# Altium PCB Smart_Umbrella.PcbDoc
Units mil, origin at the board's own origin, x right, y up, seen from the top; angles counter-clockwise.
Board outline 6000 x 4000 mil, 2 copper layers (Top Layer, Bottom Layer); 50 components, 39 nets, 166 pads, 0 vias.
Unrouted connection lines stored in the file: 103.
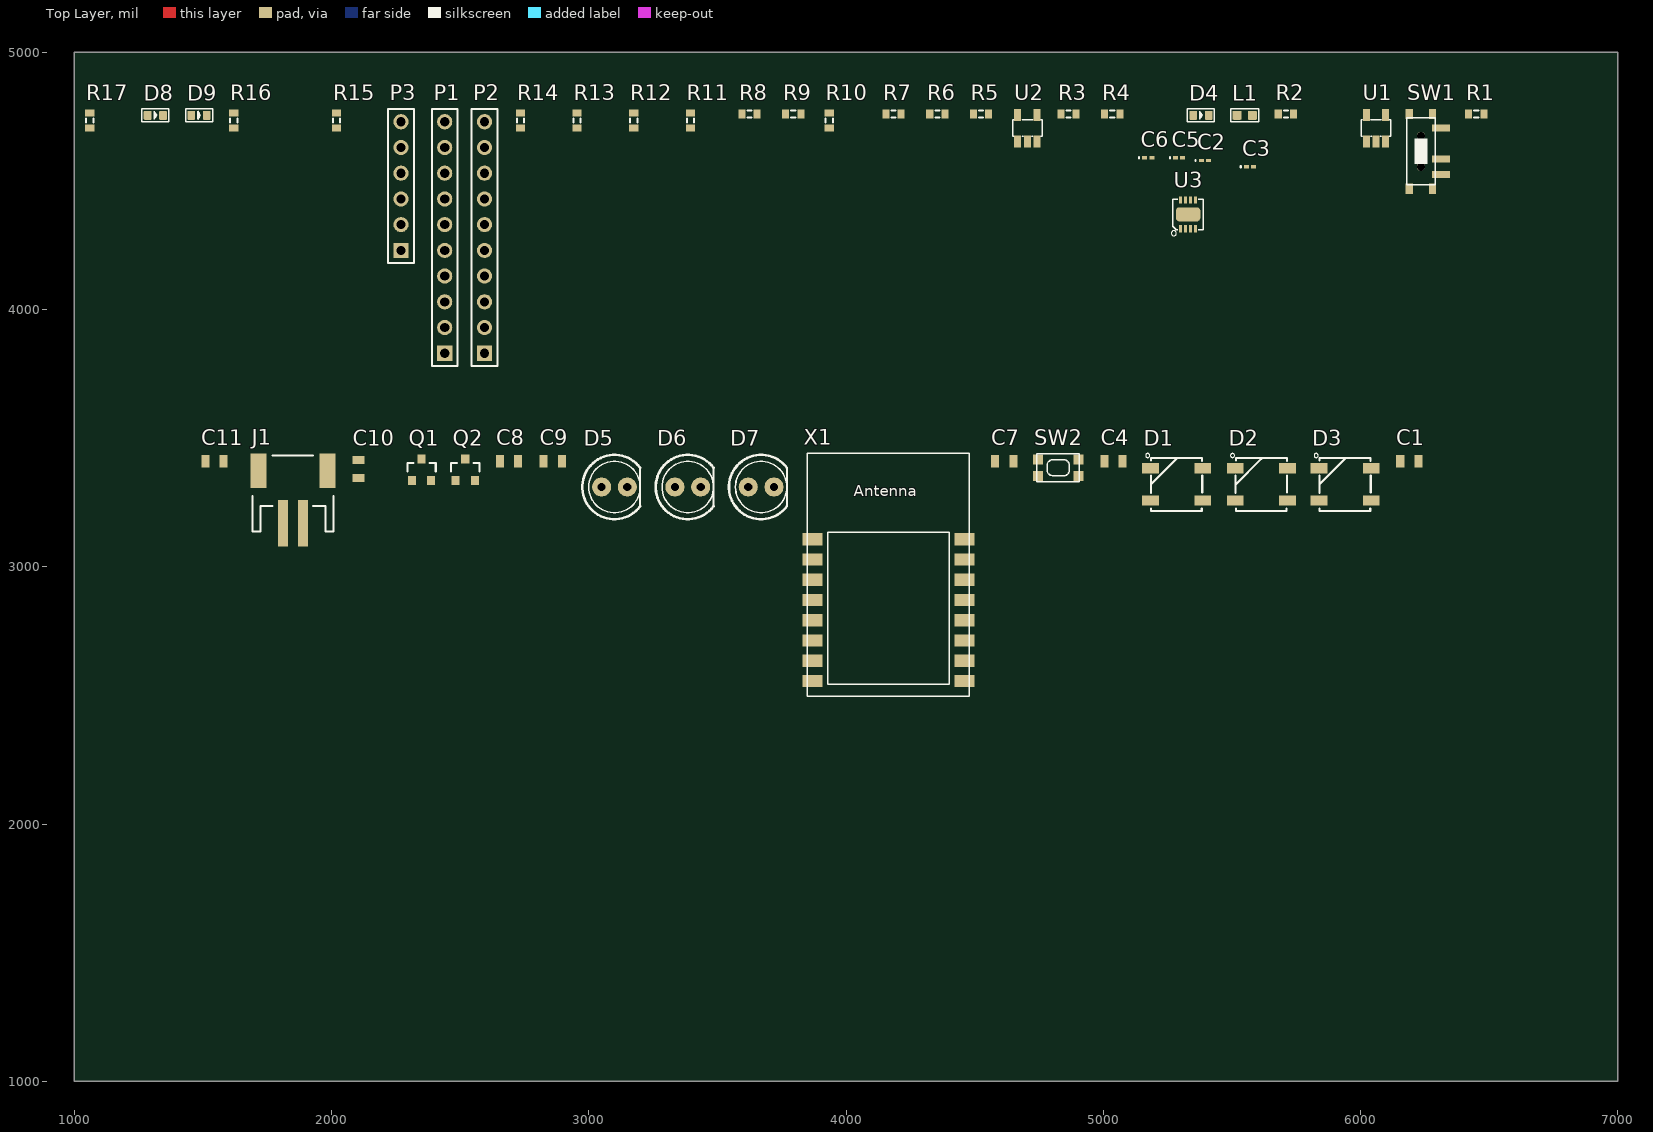
[diagram p0: Top Layer view]
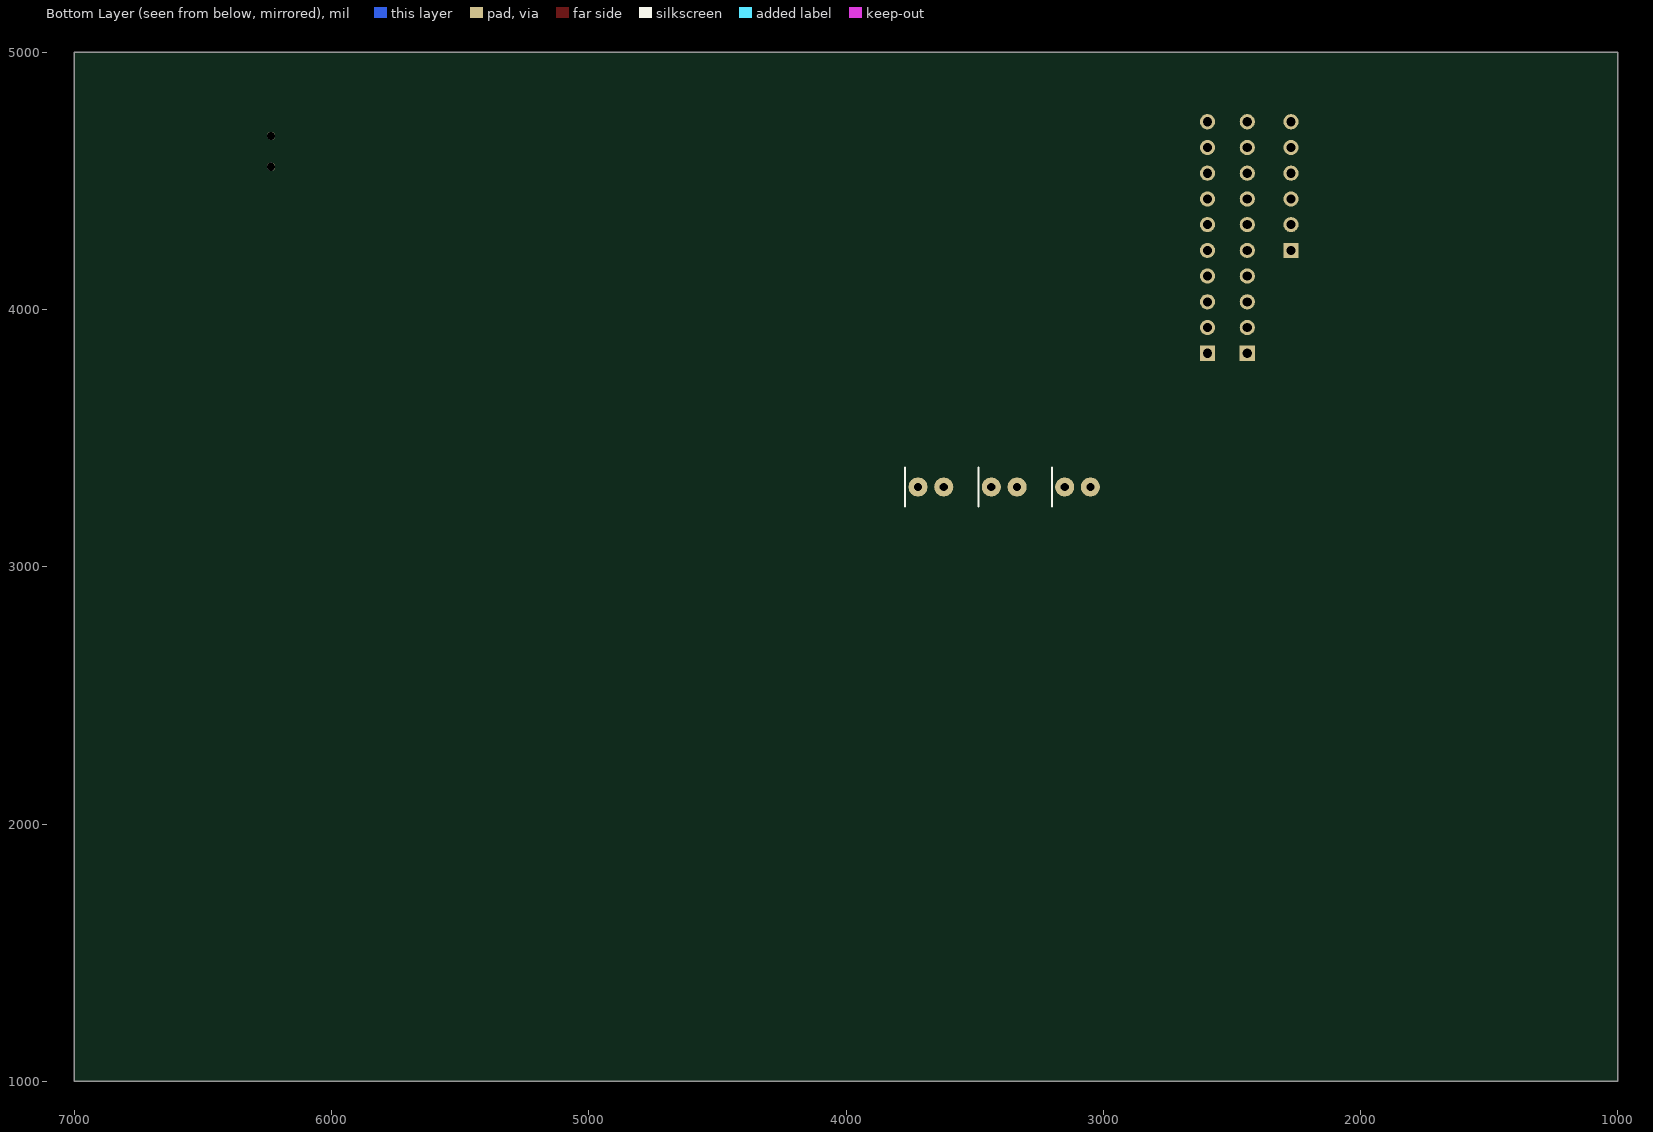
[diagram p1: Bottom Layer view, seen from below]

## Layer stack, top to bottom
Top Solder: solder mask 0.4, Solder Resist, Dk 3.5
Top Layer: signal copper 1.4
Dielectric 1: dielectric 12.6, FR-4, Dk 4.8
Bottom Layer: signal copper 1.4
Bottom Solder: solder mask 0.4, Solder Resist, Dk 3.5

## Board outline
1000,1000 7000,1000 7000,5000 1000,5000

## Design rules (kind name [scope] priority, off if disabled: settings)
Clearance [All] p1: gap=10
PolygonConnect [All] p1: connectstyle=Relief reliefconductorwidth=10 reliefentries=4 polygonreliefangle="90 Angle" airgapwidth=10
RoomDefinition Smart_Umbrella [InComponentClass('Smart_Umbrella')] p1: confinementstyle=ConfineIn formatcopy=TRUE lockcomponents=FALSE outline 1030,2390 6850,2390 6850,4890 1030,4890
RoutingVias [All] p1: holewidth=28 width=50 viastyle="Through Hole" minholewidth=28 minwidth=50 maxholewidth=28 maxwidth=50
SolderMaskExpansion [All] p1: expansion=4
Width [All] p1: maxlimit=10 minlimit=10 preferedwidth=10
30 further rules are at their usual default settings.

## Components (designator, comment, footprint, x,y, rotation, side; value= is the part's Value field where it differs from the comment)
C1 "10µF" 0805 6190,3410 r0 top
C2 "1µF" 0603 5395,4580 r0 top
C3 "1µF" 0603 5570,4555 r0 top
C4 "0.1µF" 0805 5040,3410 r0 top
C5 "1µF" 0603 5295,4590 r0 top
C6 "2.2nF" 0603 5175,4590 r0 top
C7 "4.7µF" 0805 4615,3410 r0 top
C8 "22µF" 0805 2690,3410 r0 top
C9 "22µF" 0805 2860,3410 r0 top
C10 "4.7µF" 0805 2105,3380 r90 top
C11 "22µF" 0805 1545,3410 r0 top
D1 "WS2812B5050" WS2812B 5285,3320 r0 top
D2 "WS2812B5050" WS2812B 5615,3320 r0 top
D3 "WS2812B5050" WS2812B 5940,3320 r0 top
D4 "Red" LED-0603 5380,4755 r0 top
D5 "LED" LED_5MM 3100,3310 r0 top
D6 "LED" LED_5MM 3385,3310 r0 top
D7 "LED" LED_5MM 3670,3310 r0 top
D8 "Green" LED-0603 1315,4755 r0 top
D9 "Orange" LED-0603 1485,4755 r0 top
J1 "JSTPH" JST-2-SMD 1850,3315 r0 top
L1 "6.8µH" L0603 5550,4755 r0 top
P1 "Header 10" HDR1X10 2440,3830 r90 top
P2 "Header 10" HDR1X10 2595,3830 r90 top
P3 "Header 6" HDR1X6 2270,4230 r90 top
Q1 "MMBT3904L" SOT23-3 2350,3375 r0 top
Q2 "MMBT3904L" SOT23-3 2520,3375 r0 top
R1 "Res3" J1-0603 6450,4760 r0 top
R2 "Res3" J1-0603 5710,4760 r0 top
R3 "Res3" J1-0603 4865,4760 r0 top
R4 "Res3" J1-0603 5035,4760 r0 top
R5 "Res3" J1-0603 4525,4760 r0 top
R6 "Res3" J1-0603 4355,4760 r0 top
R7 "Res3" J1-0603 4185,4760 r0 top
R8 "Res3" J1-0603 3625,4760 r0 top
R9 "Res3" J1-0603 3795,4760 r0 top
R10 "Res3" J1-0603 3935,4735 r90 top
R11 "Res3" J1-0603 3395,4735 r90 top
R12 "Res3" J1-0603 3175,4735 r90 top
R13 "Res3" J1-0603 2955,4735 r90 top
R14 "Res3" J1-0603 2735,4735 r90 top
R15 "Res3" J1-0603 2020,4735 r90 top
R16 "Res3" J1-0603 1620,4735 r90 top
R17 "Res3" J1-0603 1060,4735 r90 top
SW1 "MK-12C02" SW7-SMD-L6.7X2.7X3.2MM 6235,4615 r0 top
SW2 "DHT-4235A" KMR2 4825,3385 r0 top
U1 "XC6204B332MR" SOT-23-5 6060,4705 r0 top
U2 "ETA1036-50S2F" SOT-23-5 4705,4705 r0 top
U3 "CN3065" DFN8G-0.5-3X3MM 5330,4370 r0 top
X1 "ESP-12" ESP-12 4165,2930 r0 top

## Footprints (in the part's own frame and the unit in brackets; to place one, negate y for a bottom-side part, rotate by r counter-clockwise, add the part's x,y. Pads: shape width x height; smd on the part's side, far side on the other; paste and mask are expansions set on the pad)
0603 [mm] "Chip Inductor, Body 0.6x0.3mm, IPC High Density"
  rect 0.5x0.3 smd: 1(-0.35,0) 2(0.35,0)
  silkscreen extent -0.9,-0.05 -0.9,0.05, body extent -0.33,-0.18 0.33,0.18, height 0.55
0805 [mil]
  rect 31.5x47.24 smd: 1(-35.43,0) 2(35.43,0)
DFN8G-0.5-3X3MM [mil]
  rect 11.81x28.62 smd: 1(-29.53,-55.65) 2(-9.84,-55.65) 3(9.84,-55.65) 4(29.53,-55.65) 5(29.53,55.65) 6(9.84,55.65) 7(-9.84,55.65) 8(-29.53,55.65)
  rrect50% 95x55 smd: HEAT(0,0)
  silkscreen extent -65,-84 59,59
ESP-12 [mm]
  rect 2x1.2 smd: 1(-7.5,4.5) 2(-7.5,2.5) 3(-7.5,0.5) 4(-7.5,-1.5) 5(-7.5,-3.5) 6(-7.5,-5.5) 7(-7.5,-7.5) 8(-7.5,-9.5) 9(7.5,-9.5) 10(7.5,-7.5) 11(7.5,-5.5) 12(7.5,-3.5) 13(7.5,-1.5) 14(7.5,0.5) 15(7.5,2.5) 16(7.5,4.5)
  Mechanical 8 keep-out region: -8,6 8,6 8,13 -8,13
  Mechanical 9 keep-out region: -8,6 8,6 8,13 -8,13
  silkscreen extent -8,-11 8,13
HDR1X6 [mm] "Connector; Header; 6 Position"
  rect 1.5x1.5 hole 0.9: 1(0,0)
  round 1.5 hole 0.9: 2(2.54,0) 3(5.08,0) 4(7.62,0) 5(10.16,0) 6(12.7,0)
  silkscreen extent -1.27,-1.27 13.97,1.27
HDR1X10 [mm] "Connector; Header; 10 Position"
  rect 1.5x1.5 hole 0.9: 1(0,0)
  round 1.5 hole 0.9: 2(2.54,0) 3(5.08,0) 4(7.62,0) 5(10.16,0) 6(12.7,0) 7(15.24,0) 8(17.78,0) 9(20.32,0) 10(22.86,0)
  silkscreen extent -1.27,-1.27 24.13,1.27
J1-0603 [mm] "Chip Resistor, Body 1.6x0.8mm, IPC High Density"
  rect 0.7x0.9 smd: 1(-0.75,0) 2(0.75,0)
  silkscreen extent -0.2,-0.35 0.2,0.35, body extent -0.85,-0.48 0.85,0.48, height 0.9
JST-2-SMD [mm]
  rect 1x4.6 smd: 1(-1,-3.7) 2(1,-3.7)
  rect 1.6x3.4 smd: NC1(-3.4,1.5) NC2(3.4,1.5)
  silkscreen extent -4,-4.5 4,3
KMR2 [mm]
  rect 1x1 smd: 1(2,0.8) 2(2,-0.8) 3(-2,0.8) 4(-2,-0.8)
  silkscreen extent -2.1,-1.4 2.1,1.4
L0603 [mil]
  rrect25% 35x35 smd: 1(-30,0) 2(30,0)
  silkscreen extent -55,-25 55,25
LED-0603 [mil]
  rrect25% 30x35 smd: +(-30,0) -(30,0)
  silkscreen extent -52,-25 52,25
LED_5MM [mil]
  round 74 hole 32: A(-50,0) K(50,0)
  silkscreen extent -125,-125 100,125
SOT23-3 [mil]
  rect 31.5x35.43 smd: 1(-37.4,-39.37) 2(37.4,-39.37) 3(0,43.31)
  silkscreen extent -55,-4 55,28
SOT-23-5 [mil]
  rect 27.17x47.24 smd: 1(-37.4,-51.19) 2(0,-51.19) 3(37.4,-51.19) 4(37.4,51.19) 5(-37.4,51.19)
  silkscreen extent -57,-32 57,32
SW7-SMD-L6.7X2.7X3.2MM [mil]
  round 32 hole 32: 1(0,-60) 1(0,60)
  rect 70.87x27.56 smd: A(77.87,90) B(77.87,-90) COM(77.87,-30)
  rect 27.56x40 smd: SS1(-45.28,-145) SS2(45.28,-145) SS3(45.28,145) SS4(-45.28,145)
  silkscreen extent -55,-130 55,130
WS2812B [mil]
  rect 65x39.37 smd: 1(101.46,-62.99) 2(101.46,62.99) 3(-101.46,62.99) 4(-101.46,-62.99)
  silkscreen extent -120,-103 100,120

## Part data
C1 C4 C7 C8 C9 C10 C11: library part 10UF-0805-10V-10%
C2 C3 C5 C6: library part 1.0UF-0603-16V-10%
D4: library part LED-0603
D5 D6 D7: library part LED5MM
D8 D9: library part LED-RED0603
J1: library part JST_2MM_MALE
L1: library part INDUCTOR/FERRITE-BEAD-0603
P1 P2: "Header, 10-Pin"
P3: "Header, 6-Pin"
Q1 Q2: library part TRANSISTOR_NPNSOT23-3, "Transistor NPNBJT configuration in SOT23 package. MMBT2222 is the common NPN we use. Double check BCE configuration again layout."
R1 R2 R3 R4 R5 R6 R7 R8 R9 R10 R11 R12 R13 R14 R15 R16 R17: "Resistor"
SW1: library part SMD-TOGGLE-SWITCH-ON-ON(3+4P-6.7X2.7MM)
SW2: library part SPST_TACT-KMR2
U1: library part PMIC-LDO-XC6204B332MR(SOT23-5)
U2: library part PMIC-ETA1036-50S2F-T(SOT23-5)
U3: library part PMIC-CN3065(DFN8)

## Nets (pads, with @x,y where several pads share a name; then routed paths per layer and width w, separated by ;. In a path a pad name is that pad's centre, name@x,y a point inside that pad or via, vN(x,y) a via of type N, cw(c..) or ccw(c..) an arc to the next point about the centre after c; other vN are vias at no path point)
3.3V: C5.1 D4.+ P1.8 P2.9 R1.2 R3.2 R4.2 U1.4 X1.8
ADC: P1.2 R11.2 X1.2
CH_PD: P1.3 R4.1 X1.3
CTS: P3.5
DTR: P3.1 Q2.2 R14.1
GND: C1.2 C2.2 C3.2 C4.2 C5.2 C7.2 C8.2 C9.2 C10.2 C11.2 J1.1 P1.10 P2.10 P3.6 R6.1 R8.1 R9.1 R10.1 R13.2 R16.1 SW2.1 SW2.3 U1.2 U2.2 U3.1 U3.3 X1.9
GPIO0: P2.5 Q2.3 R5.1 X1.12
GPIO2: P2.6 R3.1 X1.11
GPIO4/SDA: P2.4 U2.3 X1.13
GPIO5/SCL: P2.3 R2.1 X1.14
GPIO12/MISO: P1.6 X1.6
GPIO13/MOSI: P1.7 X1.7
GPIO14/SCK: P1.5 X1.5
GPIO15: P2.7 R6.2 X1.10
GPIO16: P1.4 X1.4
NetC4_1: C4.1 SW1.COM U1.1 U1.3
NetC6_1: C6.1 L1.2 U2.5
NetC6_2: C6.2 C8.1 C9.1 D5.A D6.A D7.A U2.1
NetD1_2-DOUT: 
NetD1_4-DIN: R2.2
NetD2_2-DOUT: 
NetD4_-: D4.- R5.2
NetD5_K: D5.K R8.2
NetD6_K: D6.K R9.2
NetD7_K: D7.K R10.2
NetD8_A: R17.2
NetD8_C: U3.6
NetD9_C: U3.7
NetQ1_1: Q1.1 R14.2
NetQ2_1: Q2.1 R12.2
NetR7_1: R7.1 R11.1 R13.1
NetR15_1: R15.1 U3.5 U3.8
NetR16_2: R16.2 U3.2
RESET: P1.1 Q1.3 R1.1 SW2.2 SW2.4 X1.1
RTS: Q1.2 R12.1
RXD: P2.2 P3.3 X1.15
TXD: P2.1 P3.2 X1.16
VBAT: C1.1 C2.1 C3.1 C7.1 C10.1 J1.2 L1.1 P1.9 R7.2 R15.2 SW1.B U2.4
VBUS: C11.1 P2.8 P3.4 R17.1 SW1.A U3.4
pads on no net: D1.1 D1.2 D1.3 D1.4 D2.1 D2.2 D2.3 D2.4 D3.1 D3.2 D3.3 D3.4 D8.+ D8.- D9.+ D9.- J1.NC1 J1.NC2 SW1.1 SW1.SS1 SW1.SS2 SW1.SS3 SW1.SS4 U1.5 U3.HEAT

## Text inside footprints (layer, text, board x,y; h text height)
X1: Top Overlay "Antenna" at 4030,3275 h42.5